# EAGLE board tactile_controller (EAGLE 7.7.0)
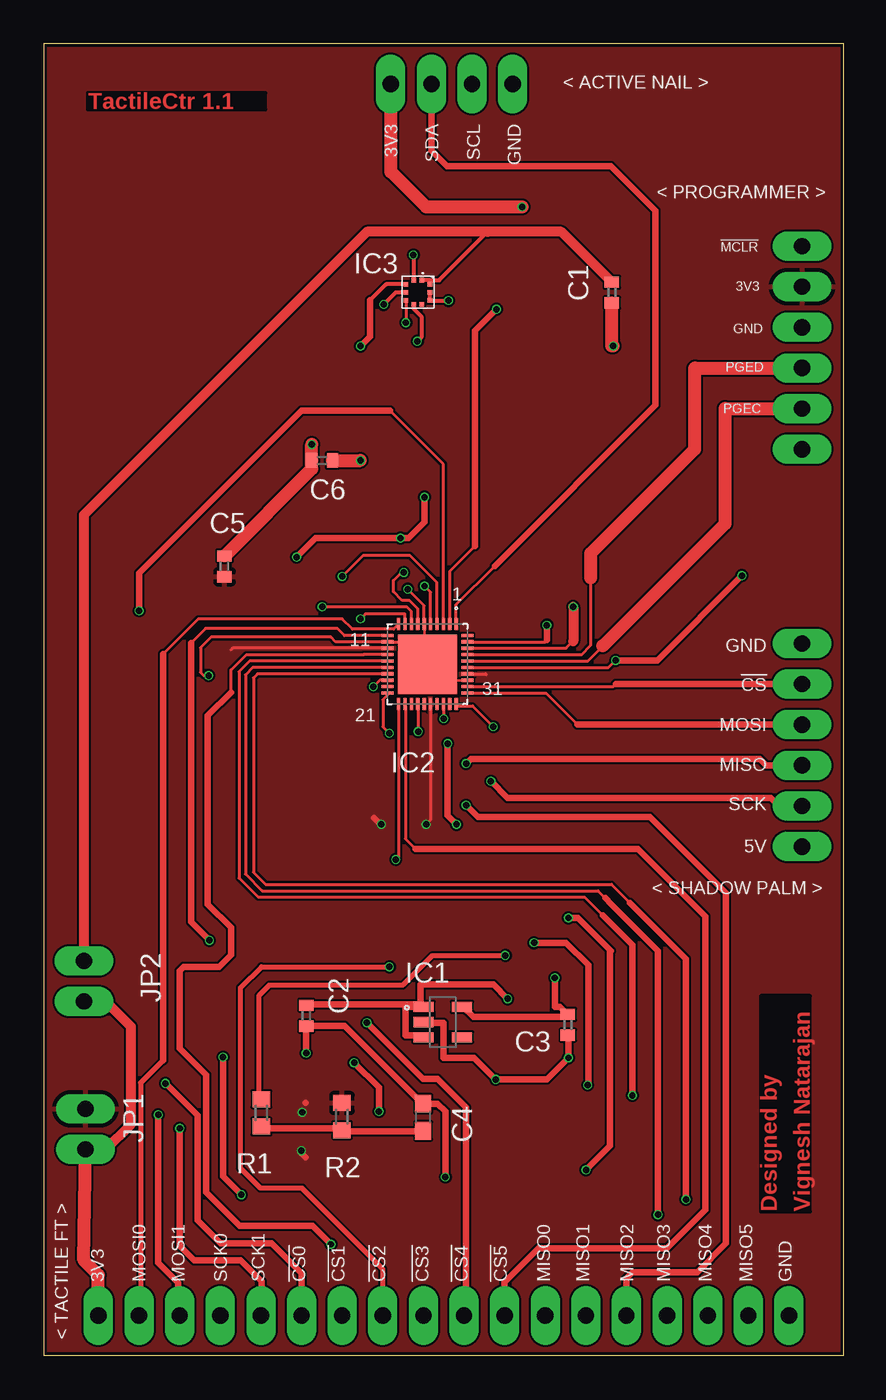
[diagram p0: board, top side]
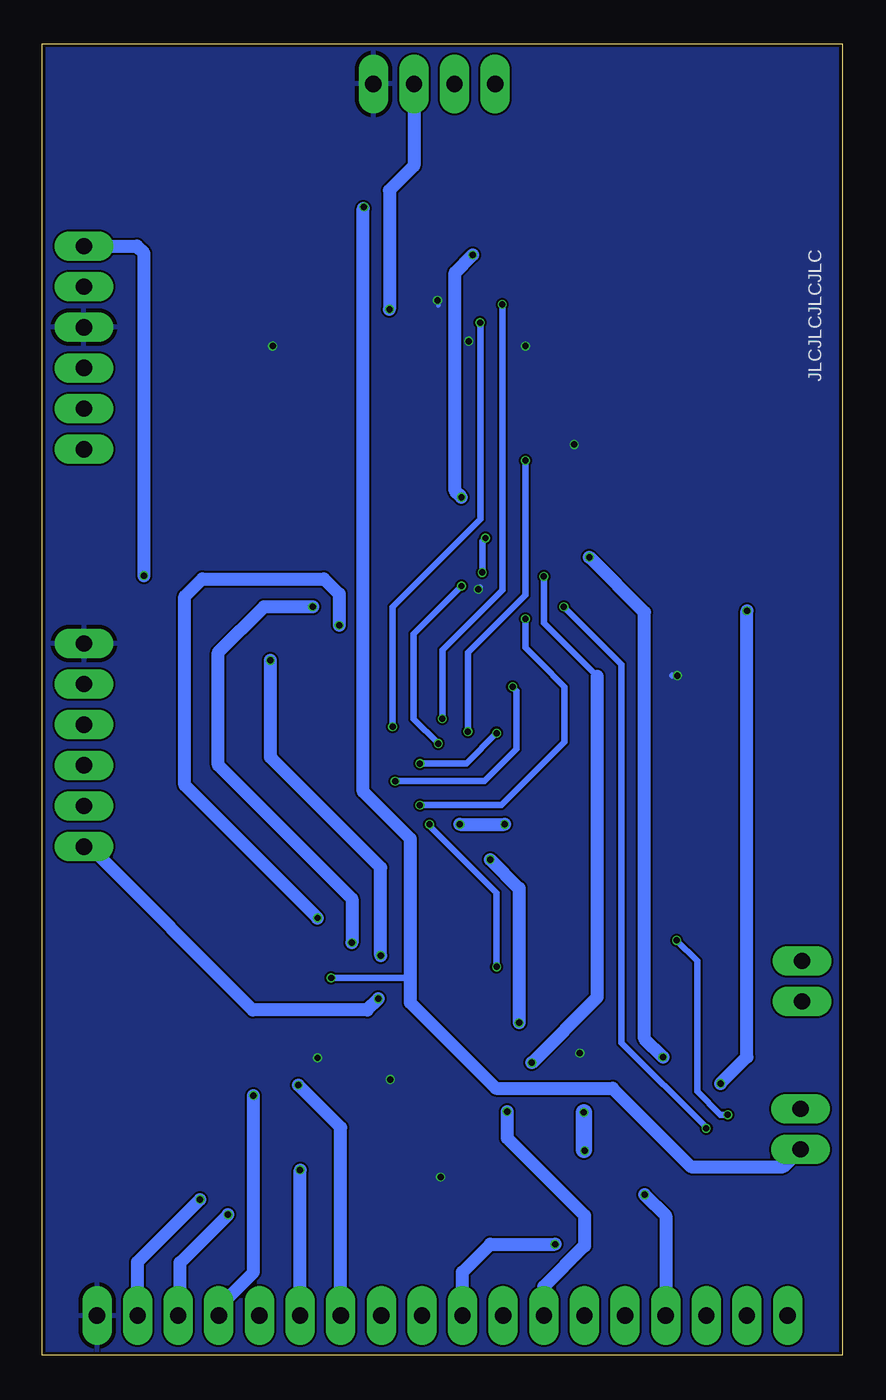
[diagram p1: board, bottom side, seen from below]

Size 50 x 82 mm. Coordinates in mm from the lower left corner, seen from the top.
Outline: 0,0 50,0 50,82 0,82 0,0
Copper layers (1*16): Top 0.035mm / dielectric 1.6mm / Bottom 0.035mm
Design rules "jlcpcb-2layers *": minimum track width 5mil, minimum drill 0.3mm, track to track 5mil, track to pad 5mil, pad to pad 5mil, via to via 5mil, smd to smd 5mil, copper to edge 0.2mm, drill to drill 6mil, minimum pad ring 10mil, minimum via ring 3mil, stop-mask expansion 0.001mm, vias tented up to drill 0.4mm, thermal gap 10mil

## Footprints (pad centres in the part's own frame; a part is rotated, then mirrored left to right if it is on the bottom)
1X04/90 = drill 1.016 long: 1 -3.81,-3.81; 2 -1.27,-3.81; 3 1.27,-3.81; 4 3.81,-3.81
C0402 = smd 0.7 x 0.9: 1 -0.65,0; 2 0.65,0
C0603 = smd 1.1 x 1: 1 -0.85,0; 2 0.85,0
NCP164_3.3V_REGULATOR_TSOP5 = smd 1.27 x 0.635: 1 -1.25,0.95; 2 -1.25,0; 3 -1.25,-0.95; 4 1.15,-0.95; 5 1.15,0.95
PIC32MM0256GPM036_UQFN_40PIN = smd 0.75 x 0.2: 1 -2.5,1.8; 2 -2.5,1.4; 3 -2.5,1; 4 -2.5,0.6; 5 -2.5,0.2; 6 -2.5,-0.2; 7 -2.5,-0.6; 8 -2.5,-1; 9 -2.5,-1.4; 10 -2.5,-1.8; 21 2.5,-1.8; 22 2.5,-1.4; 23 2.5,-1; 24 2.5,-0.6; 25 2.5,-0.2; 26 2.5,0.2; 27 2.5,0.6; 28 2.5,1; 29 2.5,1.4; 30 2.5,1.8 | smd 0.2 x 0.75: 11 -1.8,-2.5; 12 -1.4,-2.5; 13 -1,-2.5; 14 -0.6,-2.5; 15 -0.2,-2.5; 16 0.2,-2.5; 17 0.6,-2.5; 18 1,-2.5; 19 1.4,-2.5; 20 1.8,-2.5; 31 1.8,2.5; 32 1.4,2.5; 33 1,2.5; 34 0.6,2.5; 35 0.2,2.5; 36 -0.2,2.5; 37 -0.6,2.5; 38 -1,2.5; 39 -1.4,2.5; 40 -1.8,2.5 | smd 3.7 x 3.7: 41 0,0
BMP384 = smd 0.28 x 0.29: 1 0.25,0.757; 2 -0.25,0.757; 6 -0.25,-0.757; 7 0.25,-0.757 | smd 0.29 x 0.28: 3 -0.757,0.5; 4 -0.757,0; 5 -0.757,-0.5; 8 0.757,-0.5; 9 0.757,0; 10 0.757,0.5
1X02 = drill 1.016 long: 1 -1.27,0; 2 1.27,0
1X06/90 = drill 1.016 long: 1 -6.35,-3.81; 2 -3.81,-3.81; 3 -1.27,-3.81; 4 1.27,-3.81; 5 3.81,-3.81; 6 6.35,-3.81
R0603 = smd 1 x 1.1: 1 -0.85,0; 2 0.85,0
MA06-1 = drill 1.016 long: 1 -6.35,0; 2 -3.81,0; 3 -1.27,0; 4 1.27,0; 5 3.81,0; 6 6.35,0
1X18/90 = drill 1.016 long: 1 -21.59,-3.81; 2 -19.05,-3.81; 3 -16.51,-3.81; 4 -13.97,-3.81; 5 -11.43,-3.81; 6 -8.89,-3.81; 7 -6.35,-3.81; 8 -3.81,-3.81; 9 -1.27,-3.81; 10 1.27,-3.81; 11 3.81,-3.81; 12 6.35,-3.81; 13 8.89,-3.81; 14 11.43,-3.81; 15 13.97,-3.81; 16 16.51,-3.81; 17 19.05,-3.81; 18 21.59,-3.81

## Placement (x,y rotation side)
ACTIVE_NAIL_CONN  [1X04/90]  25.5,83.3 0 top
C1  100n  [C0402]  35.51,66.45 270 top
C2  1u  [C0402]  16.41,21.24 270 top
C3  1u  [C0402]  32.76,20.67 270 top
C4  100n  [C0603]  23.71,14.89 90 top
C5  2u2  [C0402]  11.29,49.33 90 top
C6  10u  [C0402]  17.4,55.95 180 top
IC1  NCP164  [NCP164_3.3V_REGULATOR_TSOP5]  24.99,20.84 0 top
IC2  PIC32MM0256GPM036  [PIC32MM0256GPM036_UQFN_40PIN]  23.98,43.21 270 top
IC3  BMP384  [BMP384]  23.39,66.46 0 top
JP1  [1X02]  2.6,14.15 90 top
JP2  [1X02]  2.5,23.4 90 top
JP3  [1X06/90]  43.6,63 90 top
R1  1K  [R0603]  13.6,15.17 90 top
R2  10K  [R0603]  18.64,14.93 270 top
SV1  SPI_HEADER  [MA06-1]  47.4,38.16 270 top
TACTILE_FT_CONN  [1X18/90]  25,6.3 0 top

## Library data of the parts
ACTIVE_NAIL_CONN JP1-JP3 TACTILE_FT_CONN = pinhead
C1-C6 R1 R2 = rcl
IC1 = NCP164_3V3_VOLTAGE_REGULATOR_TSOP_5
IC2 = PIC32MM0256GPM036_UQFN_40PIN
IC3 = BMP384
SV1 = con-lstb; OC_FARNELL: unknown; OC_NEWARK: unknown

## Nets
!CS: IC2.32 SV1.2
!CS0: IC2.3 TACTILE_FT_CONN.6
!CS1: IC2.4 TACTILE_FT_CONN.7
!CS2: IC2.5 TACTILE_FT_CONN.8
!CS3: IC2.14 TACTILE_FT_CONN.9
!CS4: IC2.21 TACTILE_FT_CONN.10
!CS5: IC2.22 TACTILE_FT_CONN.11
!MCLR: IC2.35 JP3.6 R1.2
+3V3: ACTIVE_NAIL_CONN.1 C3.1 IC1.5 JP1.1 JP2.1 TACTILE_FT_CONN.1
+5V: C2.1 IC1.1 IC1.3 SV1.6
GND: ACTIVE_NAIL_CONN.4 C1.2 C2.2 C3.2 C4.2 C5.2 C6.2 IC1.2 IC2.6 IC2.12 IC2.33 IC2.41 IC3.3 IC3.6 IC3.8 IC3.9 JP3.4 SV1.1 TACTILE_FT_CONN.18
MISO: IC2.20 SV1.4
MISO0: IC2.38 TACTILE_FT_CONN.12
MISO1: IC2.39 TACTILE_FT_CONN.13
MISO2: IC2.9 TACTILE_FT_CONN.14
MISO3: IC2.15 TACTILE_FT_CONN.15
MISO4: IC2.16 TACTILE_FT_CONN.16
MISO5: IC2.17 TACTILE_FT_CONN.17
MISO7: IC2.30 IC3.5
MOSI: IC2.31 SV1.3
MOSI0: IC2.10 TACTILE_FT_CONN.2
MOSI1: IC2.11 TACTILE_FT_CONN.3
MOSI7: IC2.28 IC3.4
N$1: C4.1 R1.1 R2.2
N$2: C6.1 IC2.24
PGEC: IC2.36 JP3.2
PGED: IC2.37 JP3.3
SCK: IC2.18 SV1.5
SCK0: IC2.7 IC3.2 TACTILE_FT_CONN.4
SCK1: IC2.8 TACTILE_FT_CONN.5
SCL: ACTIVE_NAIL_CONN.3 IC2.2
SDA: ACTIVE_NAIL_CONN.2 IC2.1
VDD_AP: C1.1 IC3.1 IC3.10 JP2.2
VDD_MCU: C5.1 IC2.13 IC2.26 IC2.34 JP1.2 JP3.5 R2.1

## Tracks (layer width: path | path; a pad name or v marks a point on that pad's centre or on a via)
!CS
  Top 0.2: IC2.32 35.6,41.81 35.76,41.97
  Top 0.406: SV1.2 35.76,41.97
!CS0  (via drill 0.4)
  Top 0.2: IC2.3 24.98,55.72 21.65,59.05
  Top 0.406: 21.65,59.05 16.1,59.05 5.95,48.9 v5.95,46.55 | TACTILE_FT_CONN.6 16.11,5.14 14.25,7 11.05,7 9.6,8.45 9.6,15 v7.6,17
  Bottom 0.813: v5.95,46.55 5.95,18.65 v7.6,17
!CS1  (via drill 0.4)
  Top 0.2: IC2.4 24.58,48.32 22.9,50 19.95,50 v18.65,48.7
  Top 0.406: v20.95,15.25 20.95,16.75 v19.4,18.3
  Bottom 0.2: v18.65,48.7 18.65,48.6
  Bottom 0.406: 15.3,42.45 18.65,45.8 v18.65,48.7
  Bottom 0.813: TACTILE_FT_CONN.7 18.65,4.3 16.1,6.85 16.1,8.75 20.95,13.6 v20.95,15.25 | v19.4,18.3 15.3,22.4 15.3,42.45
!CS2  (via drill 0.4)
  Top 0.2: IC2.5 24.18,47.72 v23.8,48.1
  Top 0.305: TACTILE_FT_CONN.8 21.19,5.41 16.15,10.45 13.55,10.45 12.3,11.7 12.3,23 13.6,24.3 v21.6,24.3
  Top 0.406: v25.8,33.2 25.25,33.75 v25.25,38.25
  Bottom 0.406: v23.8,48.1 26.8,45.1 26.8,39.8 v25.25,38.25 | v21.6,24.3 21.6,28.9 25.8,33.1 v25.8,33.2
!CS3  (via drill 0.4)
  Top 0.2: IC2.14 20.01,43.81 arc90 20,43.8 12.65,43.8 11.7,42.85 11.7,41.45
  Top 0.406: 11.7,41.45 10.25,40 10.25,28.2 11.7,26.75 11.7,25.05 10.95,24.3 8.75,24.3 8.5,24.05 8.5,19.2 10.15,17.55 10.15,10.2 12.25,8.1 16.8,8.1 v17.95,6.95
  Bottom 0.406: 23.73,5.2 23.75,5.2
  Bottom 0.813: TACTILE_FT_CONN.9 23.73,5.2 | 23.75,5.2 22,6.95 v17.95,6.95
!CS4  (via drill 0.4)
  Top 0.152: v22,31 22.2,31
  Top 0.2: IC2.21 22.18,31.18 v22,31
  Top 0.406: v20.2,20.8 23.7,17.3 24.6,17.3 26.4,15.5 26.4,2.62 TACTILE_FT_CONN.10
  Bottom 0.813: v22,31 20.2,29.2 v20.2,20.8
!CS5
  Top 0.152: 22.6,40.6 IC2.22
  Top 0.2: 22.6,40.6 22.6,32.3 23.25,31.65
  Top 0.406: TACTILE_FT_CONN.11 28.8,4.58 30.93,6.7 38.95,6.7 41.35,9.1 41.35,27.45 37.15,31.65 23.25,31.65
!MCLR  (via drill 0.4)
  Top 0.152: 13.4,16.2 R1.2
  Top 0.2: IC2.35 35.31,43.01 v35.75,43.45
  Top 0.305: 13.4,16.2 13.45,16.25 13.45,22.5 14.1,23.15 22.45,23.15 24.3,25 v28.85,25
  Top 0.406: v35.75,43.45 38.35,43.45 v43.65,48.75
  Bottom 0.305: 35.7,37.35 35.75,37.4
  Bottom 0.813: v35.75,43.45 35.75,37.4 | 35.7,37.35 28.85,30.5 v28.85,25 | v43.65,48.75 43.65,68.9 44.1,69.35 JP3.6
+3V3  (via drill 0.4)
  Top 0.152: 2.6,12.8 JP1.1 | 2.6,22 JP2.1 | 32.6,21.4 C3.1 | 26.2,21.8 IC1.5
  Top 0.305: 32.59,21.15 arc90 C3.1
  Top 0.406: C3.1 32.28,21.8 31.95,21.8 v31.95,23.6 | 26.2,21.8 26.85,21.15 32.59,21.15
  Top 0.61: JP2.1 3.87,22.13 5.45,20.55 5.45,14.45 3.88,12.88 JP1.1
  Top 0.813: JP1.1 2.5,5.95 3.41,5.04 TACTILE_FT_CONN.1 | ACTIVE_NAIL_CONN.1 21.69,74.01 arc90 21.7,74 23.9,71.8 v29.9,71.8
  Bottom 0.152: 2.6,13 JP1.1
  Bottom 0.406: v29.9,71.8 29.9,71.75 arc-90 29.95,71.7 | 27,23.6 v31.95,23.6
  Bottom 0.813: 29.95,71.7 29.95,35.25 27,32.3 27,23.6 27,22.05 21.65,16.7 14.35,16.7 9.45,11.8 3.68,11.8 JP1.1
+5V  (via drill 0.4)
  Top 0.152: 16.6,21.8 C2.1 | 23.6,21.8 IC1.1 23.8,21.8 | 23.6,20 IC1.3
  Top 0.305: 23.55,21.98 IC1.1 | 22.6,21.75 22.65,21.8
  Top 0.406: 23.6,21.8 22.65,21.8 | 23.6,20 22.6,20 22.6,21.75 | 16.6,21.8 16.75,21.95 23.55,21.95 23.55,21.98 23.55,23.2 28.1,23.2 v29,22.3
  Bottom 0.813: v29,22.3 29.7,21.6 36.85,21.6 47.06,31.81 SV1.6
GND  (via drill 0.4)
  Top 0.152: IC2.33 26.4,42.2 25,42.2 24,43.2 IC2.41 | 22.6,44.6 23.8,43.4 IC2.41 | 21.6,44.6 IC2.12 | 22.6,44.6 23.8,44.6 23.8,45.6 IC2.6 | 22.6,44.6 IC2.41 | 22.6,67 IC3.3 | 16.4,20.4 C2.2 16.6,20.6 | 32.8,20 C3.2 | 35.6,65.8 C1.2 | 23.6,15.8 C4.2 | 23.8,20.8 IC1.2
  Top 0.2: IC2.6 23.78,46.87 v22.75,47.9 | 22.6,44.6 IC2.12 18.24,44.61 17.95,44.9 10.45,44.9 9.8,44.25 9.8,42.7 10,42.5 v10.3,42.5
  Top 0.254: IC3.3 21.4,66.96 20.4,65.96 | IC3.9 IC3.8 v25.3,65.95 | IC3.6 23.14,65.41 23.6,64.95 23.6,63.65 v23.35,63.4
  Top 0.406: v16.4,18.9 16.4,20.4 | 23.6,15.8 18.8,20.6 16.6,20.6 | v19.8,63.1 20.4,63.7 20.4,65.96 | 23.8,20.8 25,20.8 25,18.6 26.9,18.6 v28.25,17.25 31.45,17.25 v32.8,18.6 32.8,20 | v25.1,11.15 25.1,15.25 24.61,15.74 C4.2
  Top 0.813: v35.6,63.1 35.51,63.1 C1.2 | C5.2 16.75,55.44 C6.2 v16.75,56.95
  Bottom 0.254: v25.3,65.95 25.25,65.9 25.25,65.6 | v23.35,63.4 23.35,63.25
  Bottom 0.406: v22.75,47.9 22.65,48 | v10.3,42.5 10.6,42.5
  pour Bottom: 0,0 50,0 50,82 0,82
MISO  (via drill 0.4)
  Top 0.2: v21.6,38.9 21.2,39.3 21.2,41 21.5,41.3 | 21.6,41.4 21.5,41.3 | IC2.20 21.5,41.39 21.5,41.3
  Top 0.406: v26.4,37 26.7,37.3 44.75,37.3 45.16,36.89 SV1.4
  Bottom 0.406: v21.6,38.9 23.5,37 v26.4,37
MISO0  (via drill 0.4)
  Top 0.2: IC2.38 32.65,44.21 33.1,44.66
  Top 0.406: v30.65,25.8 32.65,25.8 34.05,24.4 34.05,16.95 v34,16.9
  Top 0.61: v33.1,46.8 33.1,44.66
  Bottom 0.813: TACTILE_FT_CONN.12 31.35,14.25 v34,16.9 | v30.65,25.8 30.65,28.55 39,36.9 39,43.95 36.15,46.8 v33.1,46.8
MISO1  (via drill 0.4)
  Top 0.2: IC2.39 31.35,44.61 31.45,44.71
  Top 0.406: v32.8,27.35 33.4,27.35 35.45,25.3 35.4,25.25 35.4,13.1 v33.9,11.6 | 31.45,44.71 v31.45,45.65
  Bottom 0.305: v33.89,11.6 v33.9,11.6
  Bottom 0.813: TACTILE_FT_CONN.13 v33.89,11.6 | v31.45,45.65 31.45,47.6 32.4,48.55 40,48.55 41.1,47.45 41.1,35.65 v32.8,27.35
MISO2  (via drill 0.4)
  Top 0.2: IC2.9 22.58,46.35 20.1,46.35 v19.8,46.05
  Top 0.406: 36.55,2.65 36.6,2.6 36.54,2.6 TACTILE_FT_CONN.14 36.43,4.83 36.8,5.2 40.85,5.2 42.65,7 42.65,28.9 37.9,33.65 27.15,33.65 v26.4,34.4
  Bottom 0.406: v26.4,34.4 21.3,34.4 17.35,38.35 17.35,41.8 18.9,43.35 19.8,44.25 v19.8,46.05
MISO3  (via drill 0.4)
  Top 0.2: IC2.15 12.86,43.41 arc90 12.85,43.4 12.2,42.75 12.2,29.85 13.4,28.65 33.8,28.65 34.95,27.5
  Top 0.406: v36.8,16.25 36.8,25.65 34.95,27.5
  Bottom 0.406: 38.8,3.2 38.97,3.2
  Bottom 0.813: 38.8,3.2 36.8,5.2 v36.8,16.25 | 38.97,3.2 TACTILE_FT_CONN.15
MISO4  (via drill 0.4)
  Top 0.2: IC2.16 13.06,43.01 12.6,42.55 12.6,30.1 13.65,29.05 34.65,29.05 35.5,28.2
  Top 0.406: v38.4,8.8 38.4,25.3 35.5,28.2 35.1,28.6
  Bottom 0.813: TACTILE_FT_CONN.16 41.4,2.6 41.4,5.8 v38.4,8.8
MISO5  (via drill 0.4)
  Top 0.2: IC2.17 13.35,42.61 13.35,42.6 13.1,42.35 13.1,30.2 13.85,29.45 35.5,29.45 36.65,28.3 | 40.15,24.8 arc90 40.12,24.82
  Top 0.406: v40.15,9.75 40.15,24.8 | 40.12,24.82 36.65,28.3
  Bottom 0.152: 44,2.6 TACTILE_FT_CONN.17
  Bottom 0.813: TACTILE_FT_CONN.17 44.05,5.85 v40.15,9.75
MISO7  (via drill 0.4)
  Top 0.152: 25.8,40.6 IC2.30
  Top 0.2: IC3.5 v22.63,64.57 | 25.8,40.6 26.8,40.6 v28.1,39.3
  Bottom 0.2: v22.63,64.57 22.61,64.55
  Bottom 0.406: v28.1,39.3 28.1,46.8 22.6,52.3 22.6,64.53 22.61,64.55
MOSI
  Top 0.2: IC2.31 31.4,41.4 33.37,39.43
  Top 0.406: 33.37,39.43 SV1.3
MOSI0
  Top 0.152: 6,2.6 TACTILE_FT_CONN.2
  Top 0.2: IC2.10 21.87,45.4 19.3,45.4 18.65,46.05 9.65,46.05 7.45,43.85 | 6.05,2.59 TACTILE_FT_CONN.2
  Top 0.305: 6,2.6 6.05,2.65 | 6.05,2.59 6.05,17.05 7.45,18.45
  Top 0.406: 7.45,43.85 7.45,18.45
MOSI1  (via drill 0.4)
  Top 0.152: 21.4,45 IC2.11 | 8.4,2.6 TACTILE_FT_CONN.3
  Top 0.2: 21.4,45 18.8,45 18.35,45.45 10.1,45.45 9.2,44.55
  Top 0.406: 8.4,2.6 8.4,4.55 7.15,5.8 v7.15,15.05 | 9.2,44.55 9.2,27.1 v10.35,25.95
  Bottom 0.406: v7.15,15.05 7.6,15.05 9.05,16.5 9.05,24.65 v10.35,25.95
MOSI7  (via drill 0.4)
  Top 0.2: IC2.28 24.98,39.82 v25,39.8
  Top 0.254: IC3.4 22,66.46 22,66.45 v21.25,65.7
  Bottom 0.406: v21.25,65.7 21.25,47.85 25,44.1 v25,39.8
N$1
  Top 0.152: 23.6,14 C4.1 | 18.8,14 R2.2 18.6,14.2 | 13.4,14.2 R1.1
  Top 0.406: 18.8,14 23.6,14 | 18.6,14.2 13.4,14.2
N$2  (via drill 0.4)
  Top 0.2: IC2.24 23.38,39 v23.4,39
  Top 0.813: C6.1 v19.8,55.95
  Bottom 0.406: v19.8,55.95 19.8,47.55 23.4,43.95 23.4,43.35 23.4,42.85 v23.4,39
PGEC
  Top 0.2: IC2.36 33.54,43.41 | 33.54,43.41 33.55,43.4 | 33.54,43.41 34.01,43.41 34.95,44.35
  Top 0.406: 42.6,59.2 42.61,59.19
  Top 0.813: 34.95,44.35 42.6,52 42.6,59.2 | 42.61,59.19 JP3.2
PGED
  Top 0.2: 34.2,48.6 34.2,44.4 33.6,43.8 33.6,43.81 IC2.37
  Top 0.406: 40.7,61.7 40.73,61.73
  Top 0.813: 34.2,48.6 34.2,50.15 40.7,56.65 40.7,61.7 | 40.73,61.73 JP3.3
SCK  (via drill 0.4)
  Top 0.2: IC2.18 21.01,42.21 v20.6,41.8
  Top 0.406: v27.95,35.9 29,34.85 45.45,34.85 45.95,34.35 SV1.5
  Bottom 0.406: v27.95,35.9 22.35,35.9 20.35,37.9 20.35,41.55 v20.6,41.8
SCK0  (via drill 0.4)
  Top 0.2: IC2.7 23.38,46.67 22.85,47.2 22.4,47.2 21.85,47.75 21.85,48.45 22.35,48.95 v22.5,48.95
  Top 0.254: IC3.2 23.14,68.76 v23.1,68.8
  Top 0.406: v23.8,53.65 23.8,52.1 22.8,51.1 v22.3,51.1 17,51.1 v15.8,49.9 | v11.2,18.65 11.2,11.2 v12.35,10.05
  Bottom 0.152: 11.2,2.6 TACTILE_FT_CONN.4
  Bottom 0.406: v22.3,51.1 22.5,50.9 v22.5,48.95
  Bottom 0.813: v23.1,68.8 24.2,67.7 24.2,54.05 v23.8,53.65 | v12.35,10.05 11.03,8.73 TACTILE_FT_CONN.4 | v11.2,18.65 12.35,19.8 12.35,46.45 v15.8,49.9
SCK1  (via drill 0.4)
  Top 0.2: IC2.8 22.98,46.52 22.7,46.8 v17.4,46.8
  Top 0.305: TACTILE_FT_CONN.5 13.6,2.52
  Top 0.406: 13.6,2.52 13.6,4.65 12.3,5.95 9.4,5.95 8.5,6.85 v8.5,14.2
  Bottom 0.406: v8.5,14.2 8.5,14.25 13.8,19.55 13.8,43.2 v17.4,46.8
SCL  (via drill 0.4)
  Top 0.2: IC2.2 25.38,49.03 26.95,50.6
  Top 0.406: v28.3,65.4 26.95,64.05 26.95,59.05 26.95,50.6
  Bottom 0.813: ACTIVE_NAIL_CONN.3 26.77,74.37 28.3,72.84 v28.3,65.4
SDA
  Top 0.2: 28.3,49.45 28.2,49.35 25.78,46.93 IC2.1
  Top 0.406: 28.2,49.35 38.25,59.4 38.25,71.55 35.45,74.35 25.2,74.35 24.23,75.32 ACTIVE_NAIL_CONN.2
VDD_AP
  Top 0.152: 23.6,67.2 IC3.1 | 2.6,24.8 JP2.2
  Top 0.254: 35.4,67.2 35.38,67.22 | 24.15,67.22 IC3.1 | 24.15,67.22 IC3.10 | 24.15,67.22 24.72,67.22 27.75,70.25
  Top 0.61: 35.4,67.2 C1.1 | JP2.2 2.5,52.55 20.2,70.25 27.75,70.25 32.35,70.25 35.38,67.22
VDD_MCU  (via drill 0.4, 0.4 pad 0.25)
  Top 0.152: 24.2,40.6 IC2.26 | 21.4,44.2 IC2.13
  Top 0.2: 21.1,44.2 arc-90 21.11,44.21 IC2.13 11.81,44.21 11.7,44.1 | IC2.26 24.18,33.48 v23.9,33.2 | IC2.34 27.59,42.61 arc-90 27.65,42.55 | v21.1,33.2 21.05,33.2
  Top 0.406: 21.05,33.2 20.65,33.6 | 16.37,15.78 16.35,15.8 | 16.15,15.25 v16.15,15.2 | v16.1,12.8 16.1,12.65 16.35,12.4
  Bottom 0.406: 16.15,12.85 v16.1,12.8
  Bottom 0.813: v23.9,33.2 v21.1,33.2
  Bottom 1.016: v16.15,15.2 16.15,12.85
  pour Top: 0,82 50,82 50,0 0,0

## Text on the board
Top: TactileCtr 1.1 | Designed by / / Vignesh Natarajan
bPlace: JLCJLCJLCJLC
tNames: < ACTIVE NAIL > | 3V3 | SDA | SCL | GND | < PROGRAMMER > | !MCLR | 3V3 | GND | PGED | PGEC | 1 | GND | 11 | 31 | !CS | 21 | MOSI | MISO | SCK | 5V | < SHADOW PALM > | 3V3 | MOSI0 | MOSI1 | SCK0 | SCK1 | !CS0 | !CS1 | !CS2 | !CS3 | !CS4 | !CS5 | MISO0 | MISO1 | MISO2 | MISO3 | MISO4 | MISO5 | GND | < TACTILE FT >
tStop: TactileCtr 1.1 | Designed by / / Vignesh Natarajan
tRestrict: TactileCtr 1.1 | Designed by / / Vignesh Natarajan